# EAGLE board driverMotor (EAGLE 7.5.0)
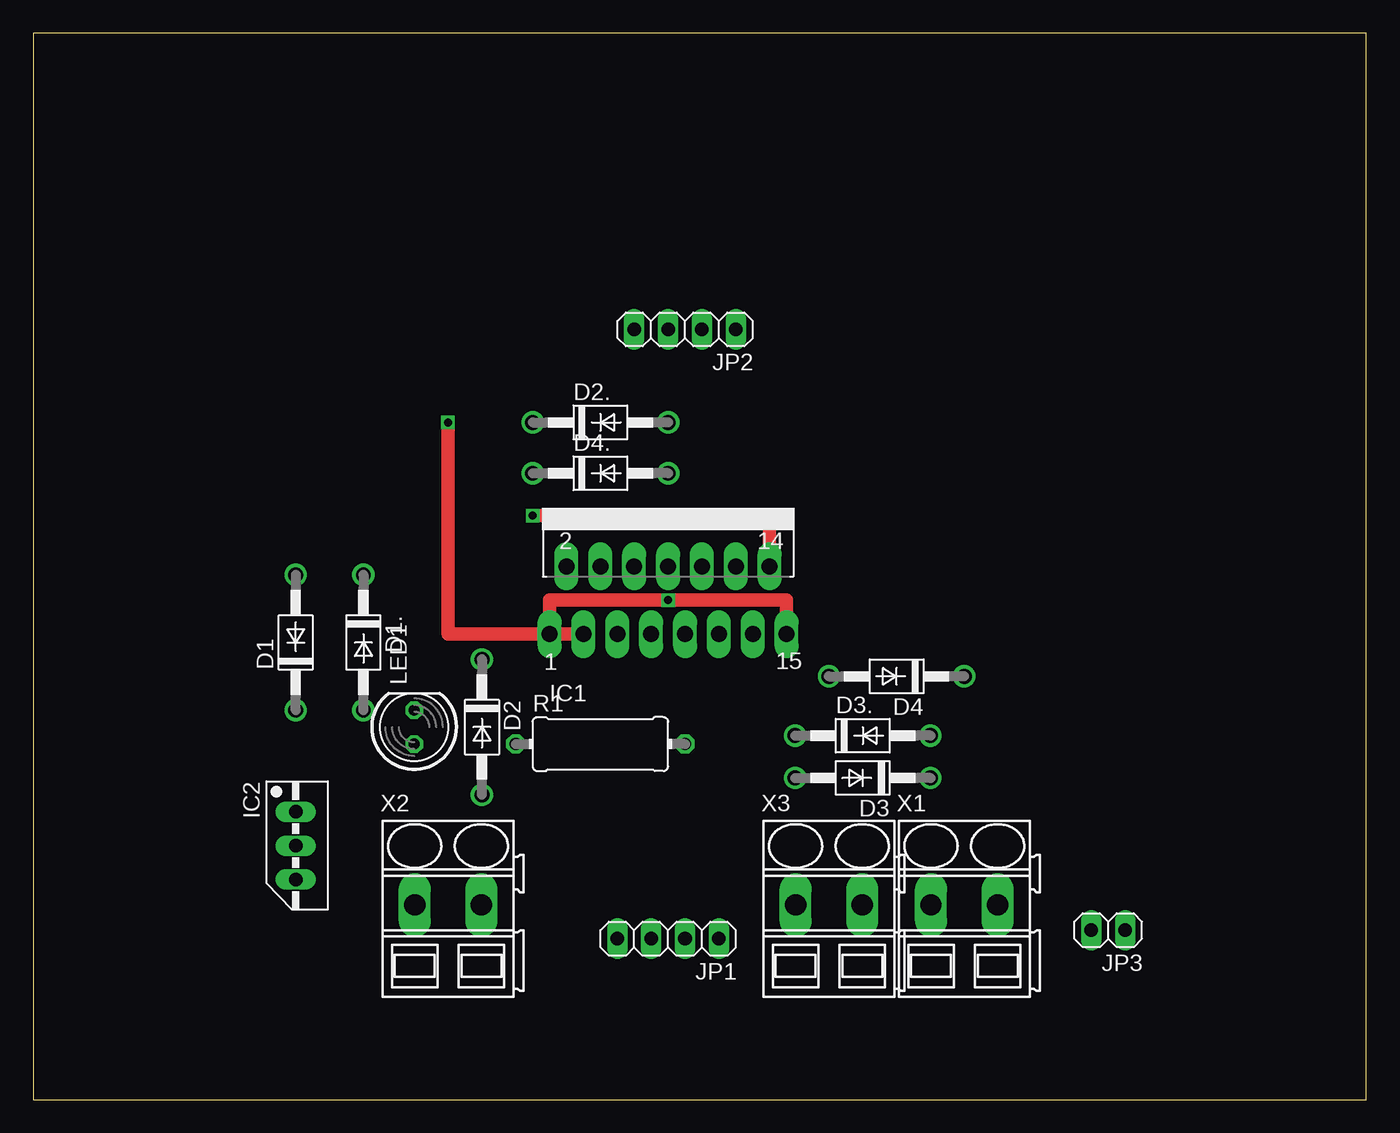
[diagram p0: board, top side]
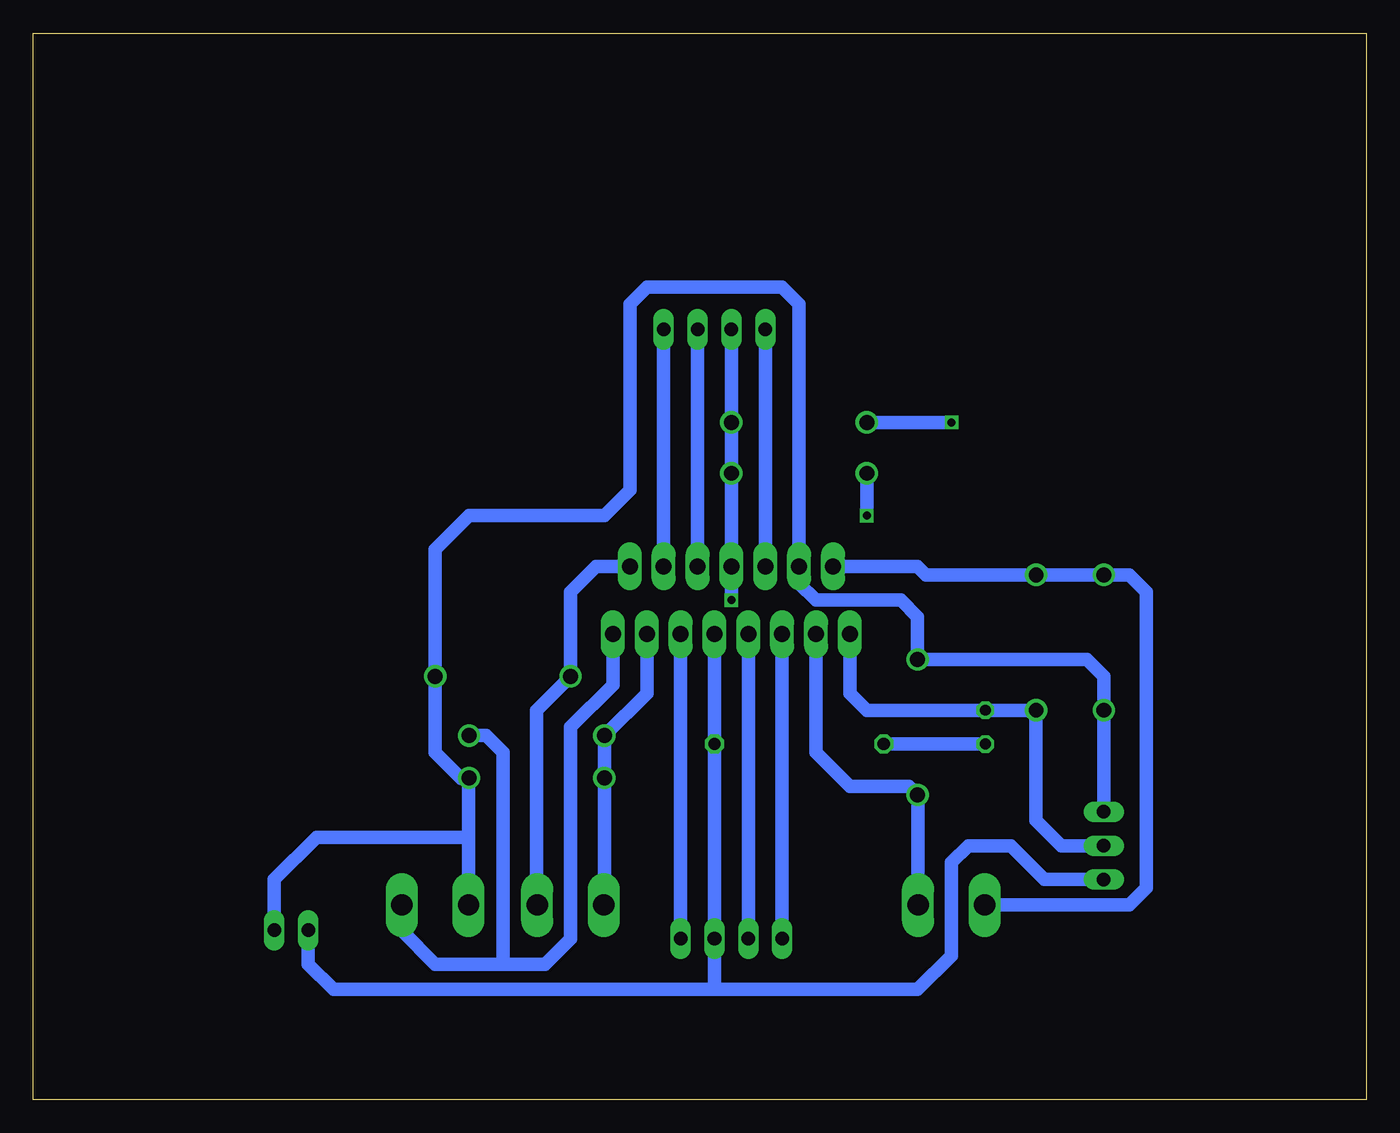
[diagram p1: board, bottom side, seen from below]

Size 100 x 80 mm. Coordinates in mm from the lower left corner, seen from the top.
Outline: 0,0 100,0 100,80 0,80 0,0
Copper layers (1*16): Top 0.035mm / dielectric 1.5mm / Bottom 0.035mm
Design rules "default": minimum track width 6mil, minimum drill 0.35mm, track to track 6mil, track to pad 6mil, pad to pad 6mil, via to via 6mil, smd to smd 6mil, copper to edge 40mil, drill to drill 6mil, minimum pad ring 10mil, minimum via ring 8mil, stop-mask expansion 4mil, vias tented up to drill 0mil, thermal gap 10mil

## Footprints (pad centres in the part's own frame; a part is rotated, then mirrored left to right if it is on the bottom)
DO41-10 = drill 1.118: A 5.08,0; C -5.08,0
MULTIWATT-15 = drill 1.2 long: 1 -8.89,-7.62; 2 -7.62,-2.54; 3 -6.35,-7.62; 4 -5.08,-2.54; 5 -3.81,-7.62; 6 -2.54,-2.54; 7 -1.27,-7.62; 8 0,-2.54; 9 1.27,-7.62; 10 2.54,-2.54; 11 3.81,-7.62; 12 5.08,-2.54; 13 6.35,-7.62; 14 7.62,-2.54; 15 8.89,-7.62
78MXXS = drill 1.016 long: GND 0,-2.54; IN -2.54,-2.54; OUT 2.54,-2.54
1X04 = drill 1.016 long: 1 -3.81,0; 2 -1.27,0; 3 1.27,0; 4 3.81,0
1X02 = drill 1.016 long: 1 -1.27,0; 2 1.27,0
LED5MM = drill 0.813 octagon: A -1.27,0; K 1.27,0
0411/12 = drill 0.914 octagon: 1 -6.35,0; 2 6.35,0
SMKDSP_1,5/2 = drill 1.6 pad 1.8 long: 1 -2.5,0; 2 2.5,0

## Placement (x,y rotation side)
D1  1N4004  [DO41-10]  19.68,34.29 90 top
D1.  1N4004  [DO41-10]  24.77,34.29 270 top
D2  1N4004  [DO41-10]  33.66,27.94 270 top
D2.  1N4004  [DO41-10]  42.55,50.8 0 top
D3  1N4004  [DO41-10]  62.23,24.13 180 top
D3.  1N4004  [DO41-10]  62.23,27.3 0 top
D4  1N4004  [DO41-10]  64.77,31.75 180 top
D4.  1N4004  [DO41-10]  42.55,46.99 0 top
IC1  L298  [MULTIWATT-15]  47.62,42.55 0 top
IC2  [78MXXS]  22.23,19.05 270 top
JP1  [1X04]  47.62,12.06 180 top
JP2  [1X04]  48.9,57.78 180 top
JP3  [1X02]  80.64,12.7 180 top
LED1  [LED5MM]  28.57,27.94 90 top
R1  [0411/12]  42.55,26.67 0 top
X1  SMKDSP_1,5/2  [SMKDSP_1,5/2]  69.85,14.61 0 top
X2  SMKDSP_1,5/2  [SMKDSP_1,5/2]  31.11,14.61 0 top
X3  SMKDSP_1,5/2  [SMKDSP_1,5/2]  59.69,14.61 0 top

## Library data of the parts
D1 D1. D2 D2. D3 D3. D4 D4. = diode
IC1 = st-microelectronics
IC2 = v-reg
JP1-JP3 = pinhead
LED1 = led
R1 = resistor
X1-X3 = con-phoenix-smkdsp; MF: FARNELL; MPN: 1733570; OC_FARNELL: 3041244; OC_NEWARK: 69C8588

## Nets
+5V: IC1.9 IC2.OUT JP1.2 JP3.2 R1.2
ENABLE_A: IC1.6 JP2.4
ENABLE_B: IC1.11 JP1.1
GND: D1..A D2..A D3..A D4..A IC1.1 IC1.8 IC1.15 IC2.GND JP2.3 LED1.K X1.2
INPUT1: IC1.5 JP1.4
INPUT2: IC1.7 JP1.3
INPUT3: IC1.10 JP2.2
INPUT4: IC1.12 JP2.1
LED: LED1.A R1.1
MOTOR1_1: D1..C D1.A IC1.2 X2.1
MOTOR1_2: D2..C D2.A IC1.3 X2.2
MOTOR2_1: D3..C D3.A IC1.13 X3.1
MOTOR2_2: D4..C D4.A IC1.14 X3.2
VS: D1.C D2.C D3.C D4.C IC1.4 IC2.IN JP3.1 X1.1

## Tracks (layer width: path | path; a pad name or v marks a point on that pad's centre or on a via)
+5V
  Bottom 1.016: JP3.2 79.38,10.16 77.47,8.26 48.9,8.26 | IC1.9 R1.2 JP1.2 48.9,8.26 | IC2.OUT 24.13,16.51 26.67,19.05 29.84,19.05 31.11,17.78 31.11,10.79 33.66,8.26 48.9,8.26
ENABLE_A
  Bottom 1.016: JP2.4 IC1.6
ENABLE_B
  Bottom 1.016: IC1.11 JP1.1
GND  (via drill 0.6)
  Top 1.016: IC1.1 38.73,37.47 v47.62,37.47 56.52,37.47 IC1.15
  Bottom 1.016: X1.2 72.35,12.66 69.85,10.16 64.77,10.16 | 64.77,10.16 61.59,10.16 59.69,12.06 59.69,27.94 56.52,31.11 IC1.15 | IC1.1 38.73,30.48 37.47,29.21 LED1.K D1..A 24.77,20.95 22.86,19.05 IC2.GND | JP2.3 D2..A D4..A IC1.8 v47.62,37.47 | D3..A 66.04,27.3 64.77,26.04 64.77,10.16
INPUT1
  Bottom 1.016: IC1.5 JP1.4
INPUT2
  Bottom 1.016: JP1.3 IC1.7
INPUT3
  Bottom 1.016: JP2.2 IC1.10
INPUT4
  Bottom 1.016: JP2.1 IC1.12
LED
  Bottom 1.016: LED1.A R1.1
MOTOR1_1
  Bottom 1.016: X2.1 17.78,14.61 16.51,15.88 16.51,38.1 17.78,39.37 D1.A D1..C 33.02,39.37 33.66,40.01 IC1.2
MOTOR1_2  (via drill 0.6)
  Top 1.016: IC1.3 31.11,34.92 v31.11,50.8
  Bottom 1.016: X2.2 33.62,22.82 D2.A 34.29,23.5 38.73,23.5 41.27,26.04 IC1.3 | v31.11,50.8 D2..C
MOTOR2_1
  Bottom 1.016: X3.1 57.15,14.64 D3.A D3..C 53.98,30.48 IC1.13
MOTOR2_2  (via drill 0.6)
  Top 1.016: IC1.14 55.24,43.81 v37.47,43.81
  Bottom 1.016: IC1.14 57.78,40.01 59.69,38.1 D4.A 62.23,29.21 62.23,14.64 X3.2 | v37.47,43.81 D4..C
VS
  Bottom 1.016: D3.C 67.35,24.09 | 67.35,24.09 67.35,19.68 | 67.35,19.68 X1.1 | JP3.1 81.92,16.51 78.74,19.68 67.35,19.68 | IC2.IN D1.C 19.68,31.75 20.95,33.02 D2.C 33.66,36.2 34.92,37.47 41.27,37.47 42.55,38.73 IC1.4 42.55,59.69 43.81,60.96 53.98,60.96 55.24,59.69 55.24,45.72 57.15,43.81 67.31,43.81 69.85,41.27 D4.C 69.85,26.04 67.91,24.09 67.35,24.09